# Altium PCB PCB1.PcbDoc
Units mm, origin at the board's own origin, x right, y up, seen from the top; angles counter-clockwise.
Board outline 111.76 x 101.6 mm, 2 copper layers (Top Layer, Bottom Layer); 74 components, 68 nets, 260 pads, 21 vias.
Unrouted connection lines stored in the file: 1.
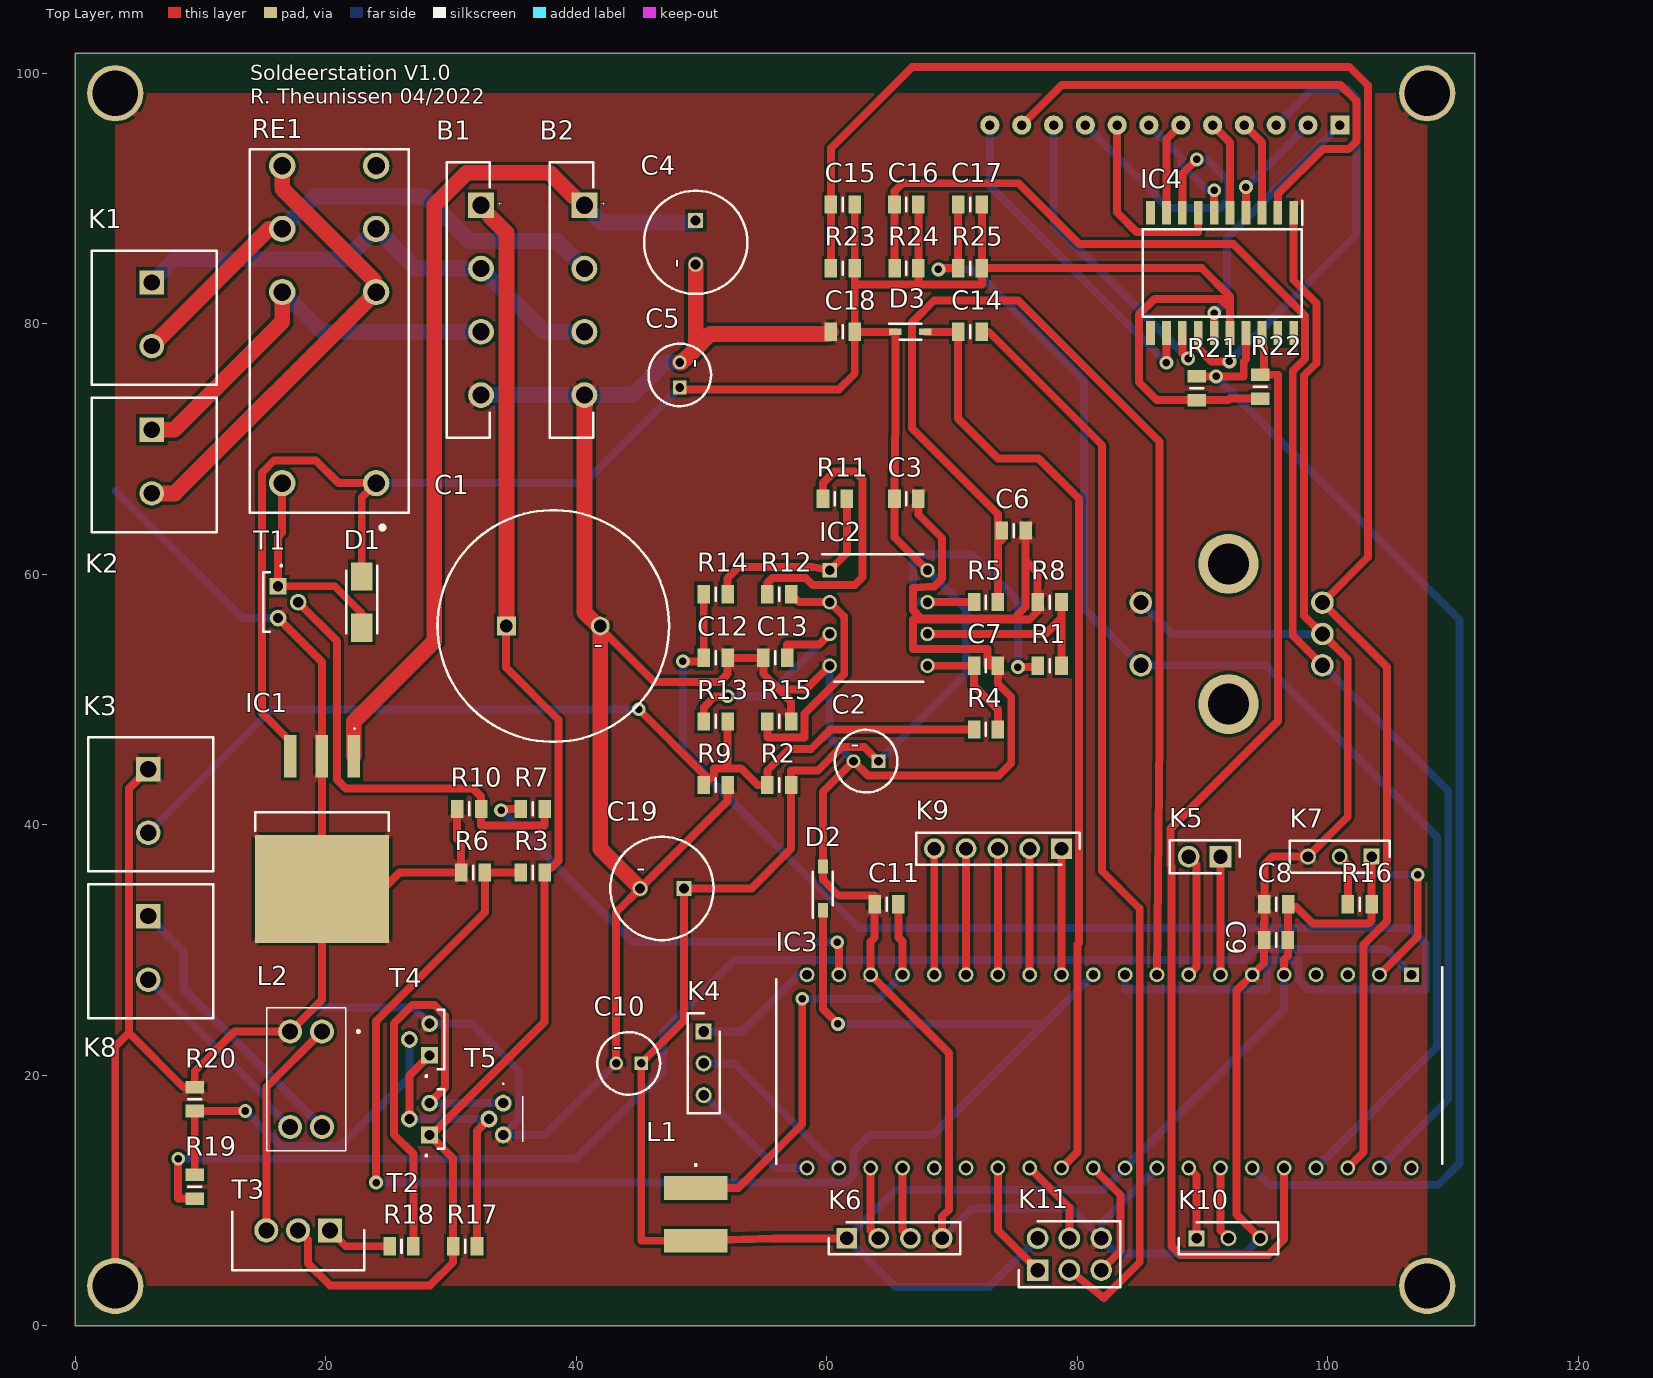
[diagram p0: Top Layer view]
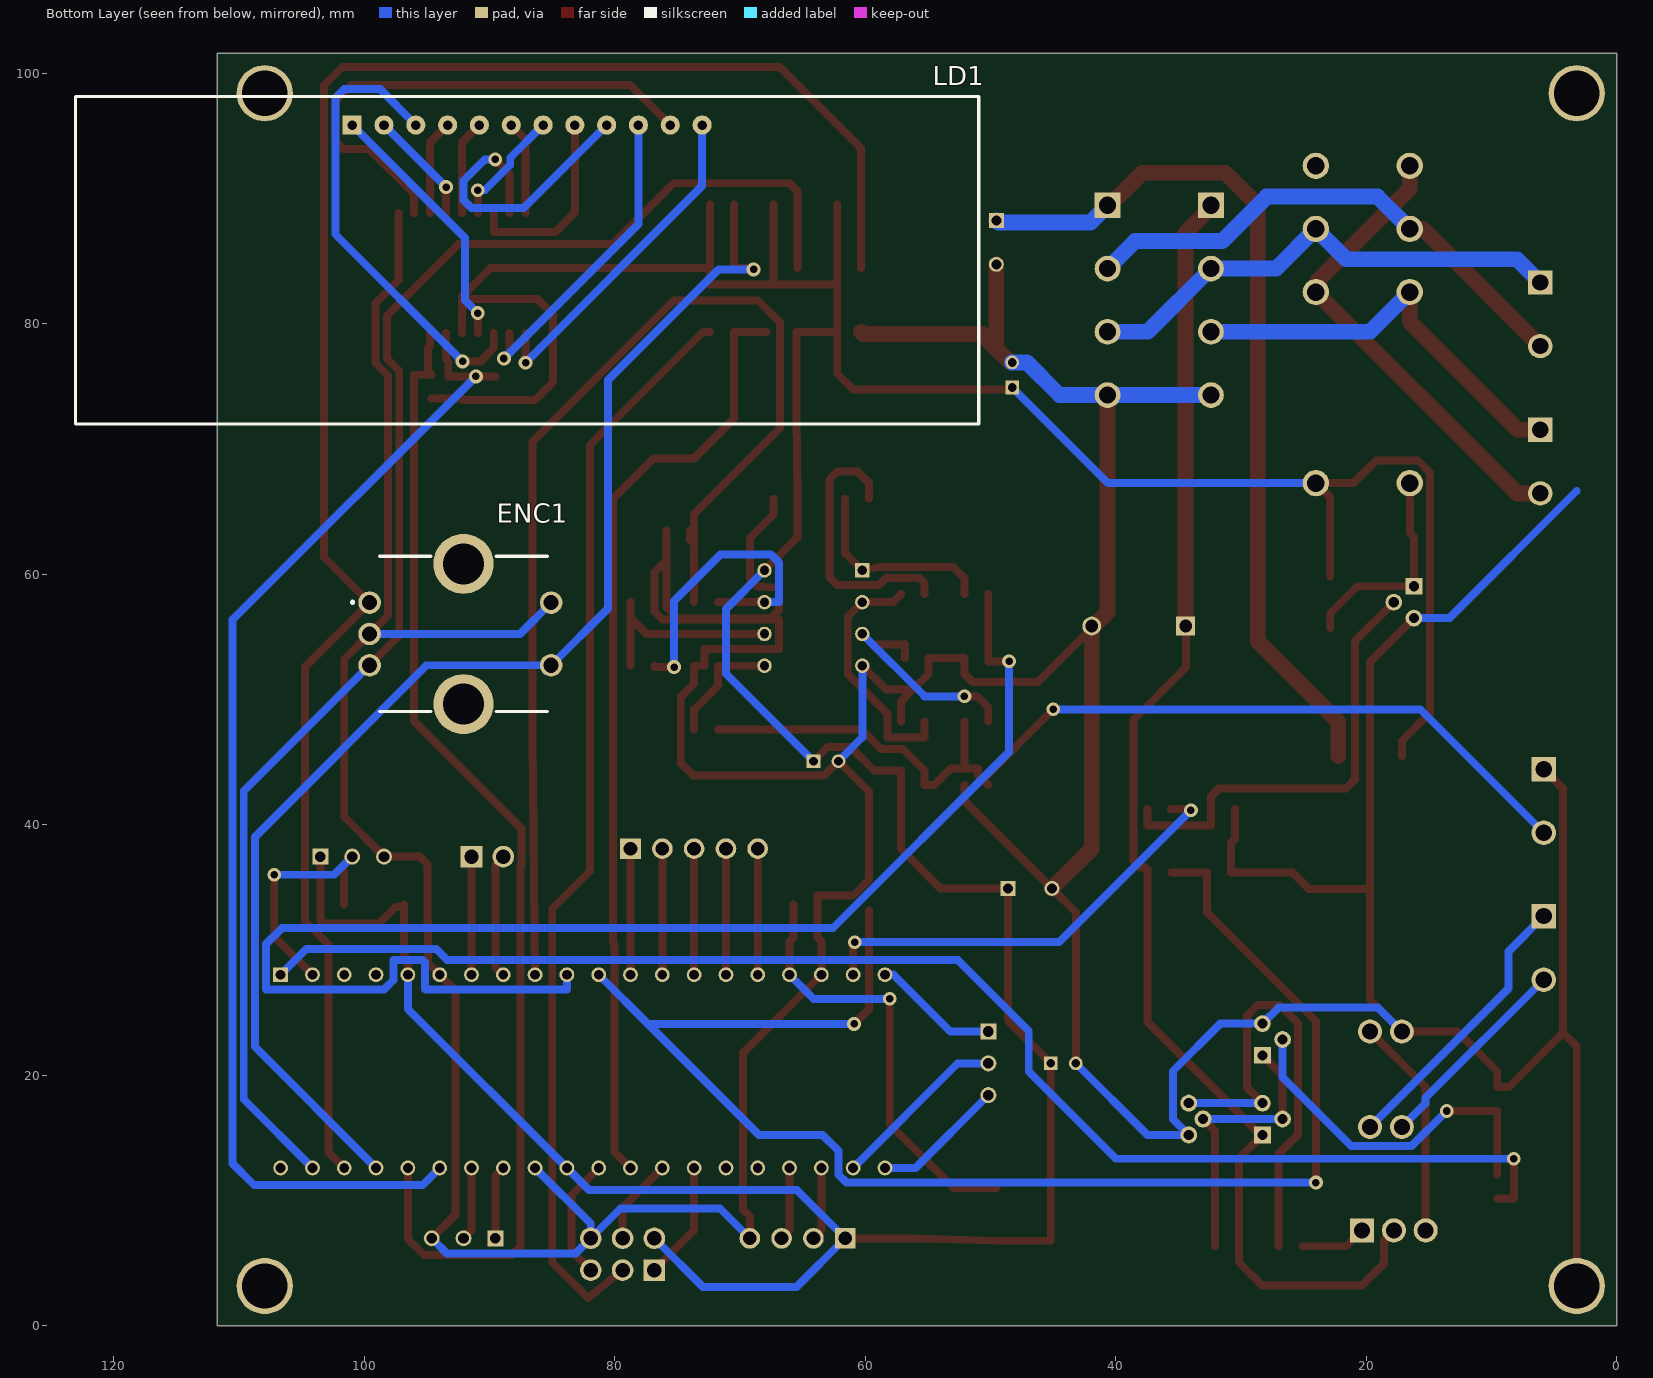
[diagram p1: Bottom Layer view, seen from below]
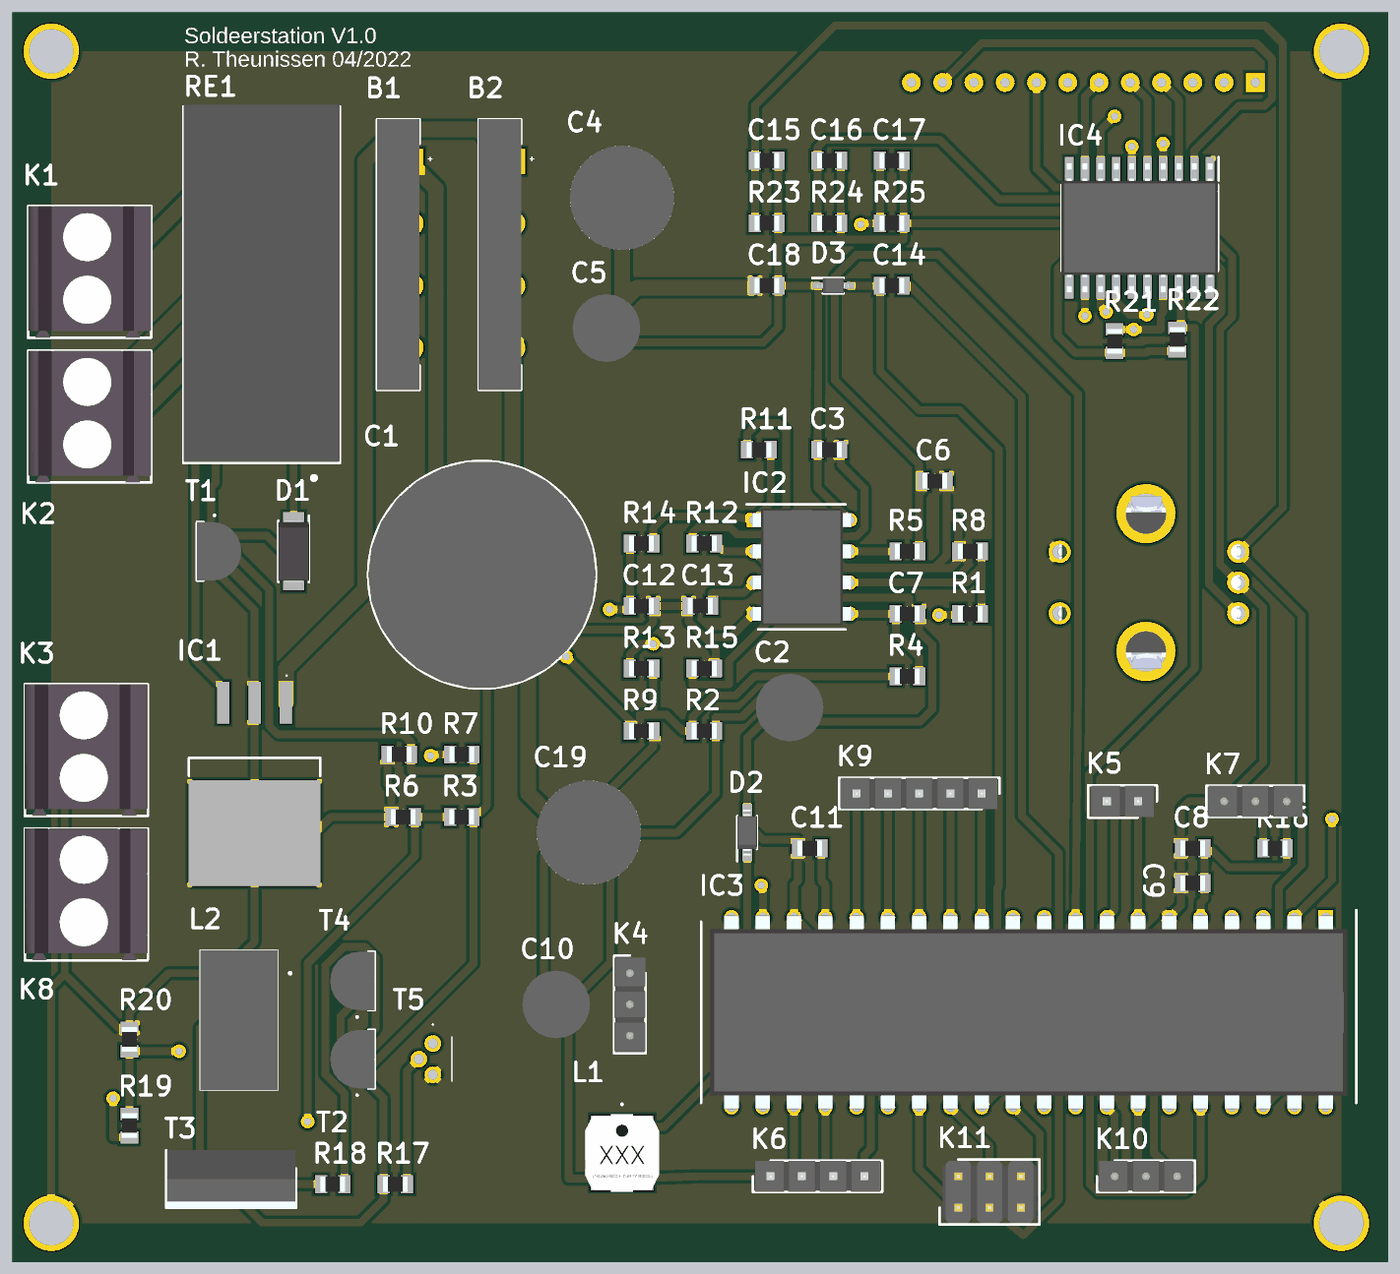
[diagram p2: 3D render of the assembled board from above, using the file's embedded part models]

## Layer stack, top to bottom
Top Solder: solder mask 0.0102, Solder Resist, Dk 3.5
Top Layer: signal copper 0.0356
Dielectric 1: dielectric 0.32, FR-4, Dk 4.8
Bottom Layer: signal copper 0.0356
Bottom Solder: solder mask 0.0102, Solder Resist, Dk 3.5

## Board outline
0,0 111.76,0 111.76,101.6 0,101.6

## Design rules (kind name [scope] priority, off if disabled: settings)
Clearance [All] p1: gap=0.254 ignorepadtopadclearanceinfootprint=FALSE except(0: Arc-Hole Track-Hole SMDPad-Hole THPad-Hole Via-Hole Fill-Hole Poly-Hole Region-Hole Text-Hole)
Height [All] p1 off: minheight=0 maxheight=25.4 prefheight=12.7
PolygonConnect [All] p1: connectstyle=Relief reliefconductorwidth=0.5 reliefentries=4 polygonreliefangle="45 Angle" airgapwidth=0.254
RoutingVias [All] p1: holewidth=0.6 width=1.1 viastyle="Through Hole" minholewidth=0.6 minwidth=1.1 maxholewidth=0.6 maxwidth=1.1
SolderMaskExpansion [All] p1: expansion=0.102 istentingtop=FALSE
Width [All] p1: maxlimit=1.27 minlimit=0.635 preferedwidth=0.635
29 further rules are at their usual default settings.

## Classes and differential pairs
component class Voeding: B1 B2 C1 C4 C5 D1 D2 IC1 K1 K2 R3 R6 R7 R10 RE1 T1
component class Temp_Sensing: C2 C3 C6 C7 C12 C13 IC2 K3 R1 R2 R4 R5 R8 R9 R11 R12 R13 R14 R15
component class Logic: C8 C9 C10 C11 C14 D3 IC3 K4 K5 K6 K7 K9 K10 K11 L1 R16 R21 R22
component class Heater_Driver: K8 L2 R17 R18 R19 R20 T2 T3 T4 T5
component class Display: C15 C16 C17 C18 C19 ENC1 IC4 LD1 R23 R24 R25

## Components (designator, comment, footprint, x,y, rotation, side; value= is the part's Value field where it differs from the comment)
B1 "GBU606-G" GBU606G 32.385,89.475 r90 top
B2 "GBU606-G" GBU606G 40.64,89.475 r90 top
C1 "4700µ" CAPPRD750W80D1850H4150 34.41,55.88 r0 top
C2 "10 uF" CAPPRD200W52D500H1250 64.135,45.085 r180 top
C3 "100n" CAPC1005X56N 66.355,66.04 r180 top
C4 "100µ" CAPPRD350W60D825H1300 49.53,88.265 r270 top
C5 "10µ" CAPPRD200W52D500H1250 48.26,74.93 r90 top
C6 "10n" CAPC1005X56N 74.93,63.5 r180 top
C7 "10n" CAPC1005X56N 72.705,52.705 r180 top
C8 "100n" CAPC1005X56N 95.885,33.655 r0 top
C9 "100n" CAPC1005X56N 95.875,30.81 r0 top
C10 "10µ" CAPPRD200W52D500H1250 45.18,20.955 r180 top
C11 "100n" CAPC1005X56N 64.77,33.655 r0 top
C12 "10n" CAPC1005X56N 51.12,53.34 r180 top
C13 "10n" CAPC1005X56N 55.88,53.34 r0 top
C14 "100n" CAPC1005X56N 71.435,79.375 r180 top
C15 "10n" CAPC1005X56N 61.28,89.535 r0 top
C16 "10n" CAPC1005X56N 66.355,89.535 r0 top
C17 "10n" CAPC1005X56N 71.435,89.535 r0 top
C18 "100n" CAPC1005X56N 61.28,79.375 r0 top
C19 "100µ" CAPPRD350W60D825H1300 48.585,34.925 r180 top
D1 "FM4007W-W" DIOM5025X231N 22.86,57.785 r270 top
D2 "MMSZ4689T1G" SOD3716X135N 59.69,34.925 r90 top
D3 "SMMDL914T11NG" SOD2512X110N 66.675,79.375 r0 top
ENC1 "PEC11R-4225F-S0024" PEC12R-4XXXF-SXXXX_1 92.075,55.245 r270 bottom
IC1 "TL780-05CKTTR" TL78005CKTTR 19.685,38.735 r180 top
IC2 "MCP6002-E_P" DIP781W56P254L950H533Q8N 64.135,56.515 r0 top
IC3 "ATMEGA4809-PF" DIP1543W58P254L5175H635Q40N 82.55,20.32 r270 top
IC4 "TM1637" SOIC127P1045X280-20N 91.567,84.074 r270 top
K1 "1716020000" 1716020000 6.096,83.312 r270 top
K2 "1716020000" 1716020000 6.096,71.552 r270 top
K3 "Printkroonsteen 2 POL" 1716020000 5.817,44.45 r270 top
K4 "M20-9990345" HDRV3W64P0X254_1X3_762X254X864P 50.165,23.495 r270 top
K5 "M20-9990246" HDRV2W66P0X254_1X2_508X254X874P 91.44,37.465 r180 top
K6 "M20-9770446" HDRV4W64P0X254_1X4_1016X254X834P 61.595,6.985 r0 top
K7 "M20-9990345" HDRV3W64P0X254_1X3_762X254X864P 103.505,37.465 r180 top
K8 "Printkroonsteen 2 POL" 1716020000 5.817,32.715 r270 top
K9 "M20-9990545" HDRV5W64P0X254_1X5_1270X254X864P 78.74,38.1 r180 top
K10 "M20-9990345" HDRV3W64P0X254_1X3_762X254X864P 89.535,6.985 r0 top
K11 "M20-9760342" HDRV6W66P254_2X3_762X508X830P 76.835,4.445 r0 top
L1 "10µH" VLS6045 49.53,8.89 r270 top
L2 "CM2545X171B-10" CM2545X171B10 19.685,23.495 r180 top
LD1 "KW4-801AVB" KW4-801AVB-FP 86.995,95.885 r180 bottom locked
R1 "18k" RESC2012X65N 77.79,52.705 r0 top
R2 "1M" RESC2012X65N 56.2,43.18 r0 top
R3 "68k" RESC2012X65N 36.51,36.195 r0 top
R4 "5k6" RESC2012X65N 72.705,47.625 r180 top
R5 "5k6" RESC2012X65N 72.705,57.785 r180 top
R6 "10k" RESC2012X65N 31.75,36.195 r0 top
R7 "10k" RESC2012X65N 36.515,41.275 r0 top
R8 "100E" RESC2012X65N 77.79,57.785 r0 top
R9 "10M" RESC2012X65N 51.12,43.18 r180 top
R10 "4k7" RESC2012X65N 31.435,41.275 r0 top
R11 "18k" RESC2012X65N 60.645,66.04 r180 top
R12 "18k" RESC2012X65N 56.2,58.42 r0 top
R13 "5k6" RESC2012X65N 51.12,48.26 r0 top
R14 "5k6" RESC2012X65N 51.12,58.42 r0 top
R15 "100E" RESC2012X65N 56.2,48.26 r180 top
R16 "4k7" RESC2012X65N 102.555,33.655 r0 top
R17 "4k7" RESC2012X65N 31.115,6.35 r180 top
R18 "100E" RESC2012X65N 26.035,6.35 r180 top
R19 "10k" RESC2012X65N 9.525,11.11 r90 top
R20 "4k7" RESC2012X65N 9.525,18.1 r270 top
R21 "4k7" RESC2012X65N 89.535,74.864 r270 top
R22 "4k7" RESC2012X65N 94.615,74.996 r270 top
R23 "10k" RESC2012X65N 61.28,84.455 r0 top
R24 "10k" RESC2012X65N 66.36,84.455 r0 top
R25 "10k" RESC2012X65N 71.44,84.455 r0 top
RE1 "RT424005" RT42 20.26,67.29 r90 top
T1 "BC547CBU" BC547CBU 16.43,59.055 r270 top
T2 "BC547CBU" BC547CBU 28.02,15.24 r90 top
T3 "IRF9Z34NPBF" TO254P469X1042X1967-3P 20.32,7.62 r180 top
T4 "BC547CBU" BC547CBU 28.02,21.59 r90 top
T5 "BC557C" BC557C 34.163,17.78 r270 top

## Footprints (in the part's own frame and the unit in brackets; to place one, negate y for a bottom-side part, rotate by r counter-clockwise, add the part's x,y. Pads: shape width x height; smd on the part's side, far side on the other; paste and mask are expansions set on the pad)
1716020000 [mm]
  rect 1.95x1.95 hole 1.3: 1(0,0)
  round 1.95 hole 1.3: 2(5.08,0)
  silkscreen extent -2.54,-4.8 8.17,5.2, body extent -2.54,-4.8 8.17,5.2, height 13.8
BC547CBU [mm]
  rect 1.333x1.333 hole 0.82: 1(0,-0.254)
  round 1.333 hole 0.82: 2(1.27,1.35) 3(2.54,-0.254)
  silkscreen extent -1.7,-1.43 3.65,0.05, body extent -1.11,-1.43 3.65,2.19, height 5.43
BC557C [mm]
  round 1.35 hole 0.81: 1(0,0) 2(1.27,-1.143) 3(2.54,0)
  silkscreen extent -1.6,-0.05 3.07,1.55
CAPC1005X56N [mm]
  rect 1x1.45 smd: 1(-0.95,0) 2(0.95,0)
  silkscreen extent 0,-0.53 0,0.53, body extent -1,-0.63 1,0.63, height 0.65
CAPPRD200W52D500H1250 [mm]
  rect 1.1x1.1 hole 0.7: 1(0,0)
  round 1.1 hole 0.7: 2(2,0)
  silkscreen extent -1.5,-2.5 3.5,2.5, body extent -1.75,-2.75 3.75,2.75, height 12.5
CAPPRD350W60D825H1300 [mm]
  rect 1.2x1.2 hole 0.8: 1(0,0)
  round 1.2 hole 0.8: 2(3.5,0)
  silkscreen extent -2.37,-4.13 5.87,4.13, body extent -2.5,-4.25 6,4.25, height 13
CAPPRD750W80D1850H4150 [mm]
  rect 1.5x1.5 hole 1: 1(0,0)
  round 1.5 hole 1: 2(7.5,0)
  silkscreen extent -5.5,-9.25 13,9.25, body extent -5.5,-9.25 13,9.25, height 41.5
CM2545X171B10 [mm]
  round 1.905 hole 1.27: 1(0,0) 2(2.54,0) 3(2.54,7.62) 4(0,7.62)
  silkscreen extent -3,-1.88 4.42,9.5, body extent -1.88,-1.88 4.42,9.5, height 9.6
DIOM5025X231N [mm]
  rect 2.25x1.7 smd: 1(-2.05,0) 2(2.05,0)
  silkscreen extent -2.9,-1.24 2.5,1.24, body extent -2.5,-1.24 2.5,1.24, height 2.31
DIP781W56P254L950H533Q8N [mm]
  rect 1.158x1.158 hole 0.758: 1(-3.905,3.81)
  round 1.158 hole 0.758: 2(-3.905,1.27) 3(-3.905,-1.27) 4(-3.905,-3.81) 5(3.905,-3.81) 6(3.905,-1.27) 7(3.905,1.27) 8(3.905,3.81)
  silkscreen extent -4.48,-5.08 3.56,5.08, body extent -4.04,-4.75 4.04,4.75, height 5.33
DIP1543W58P254L5175H635Q40N [mm]
  rect 1.184x1.184 hole 0.784: 1(-7.715,24.13)
  round 1.184 hole 0.784: 2(-7.715,21.59) 3(-7.715,19.05) 4(-7.715,16.51) 5(-7.715,13.97) 6(-7.715,11.43) 7(-7.715,8.89) 8(-7.715,6.35) 9(-7.715,3.81) 10(-7.715,1.27) 11(-7.715,-1.27) 12(-7.715,-3.81) 13(-7.715,-6.35) 14(-7.715,-8.89) 15(-7.715,-11.43) 16(-7.715,-13.97) 17(-7.715,-16.51) 18(-7.715,-19.05) 19(-7.715,-21.59) 20(-7.715,-24.13) 21(7.715,-24.13) 22(7.715,-21.59) 23(7.715,-19.05) 24(7.715,-16.51) 25(7.715,-13.97) 26(7.715,-11.43) 27(7.715,-8.89) 28(7.715,-6.35) 29(7.715,-3.81) 30(7.715,-1.27) 31(7.715,1.27) 32(7.715,3.81) 33(7.715,6.35) 34(7.715,8.89) 35(7.715,11.43) 36(7.715,13.97) 37(7.715,16.51) 38(7.715,19.05) 39(7.715,21.59) 40(7.715,24.13)
  silkscreen extent -8.31,-26.61 7.37,26.61, body extent -7.86,-25.88 7.86,25.88, height 6.35
GBU606G [mm]
  rect 2.055x2.055 hole 1.37: 1(0,0)
  round 2.055 hole 1.37: 2(-5.05,0) 3(-10.1,0) 4(-15.15,0)
  silkscreen extent -18.58,-0.69 3.42,2.75, body extent -18.57,-0.69 3.43,2.76, height 21.05
HDRV2W66P0X254_1X2_508X254X874P [mm]
  rect 1.725x1.725 hole 1.15: 1(0,0)
  round 1.725 hole 1.15: 2(2.54,0)
  silkscreen extent -1.52,-1.32 4.06,1.32, body extent -1.27,-1.27 3.81,1.27, height 8.74
HDRV3W64P0X254_1X3_762X254X864P [mm]
  rect 1.275x1.275 hole 0.85: 1(0,0)
  round 1.275 hole 0.85: 2(2.54,0) 3(5.08,0)
  silkscreen extent -1.45,-1.27 6.53,1.27, body extent -1.27,-1.27 6.35,1.27, height 8.64
HDRV4W64P0X254_1X4_1016X254X834P [mm]
  rect 1.65x1.65 hole 1.1: 1(0,0)
  round 1.65 hole 1.1: 2(2.54,0) 3(5.08,0) 4(7.62,0)
  silkscreen extent -1.45,-1.27 9.07,1.27, body extent -1.27,-1.27 8.89,1.27, height 8.34
HDRV5W64P0X254_1X5_1270X254X864P [mm]
  rect 1.65x1.65 hole 1.1: 1(0,0)
  round 1.65 hole 1.1: 2(2.54,0) 3(5.08,0) 4(7.62,0) 5(10.16,0)
  silkscreen extent -1.45,-1.27 11.61,1.27, body extent -1.27,-1.27 11.43,1.27, height 8.64
HDRV6W66P254_2X3_762X508X830P [mm]
  rect 1.725x1.725 hole 1.15: 1(0,0)
  round 1.725 hole 1.15: 2(0,2.54) 3(2.54,0) 4(2.54,2.54) 5(5.08,0) 6(5.08,2.54)
  silkscreen extent -1.52,-1.37 6.6,3.91, body extent -1.27,-1.27 6.35,3.81, height 8.38
KW4-801AVB-FP [mil]
  rect 60x60 hole 30: 1(-550,0)
  round 60 hole 30: 2(-450,0) 3(-350,0) 4(-250,0) 5(-150,0) 6(-50,0) 7(50,0) 8(150,0) 9(250,0) 10(350,0) 11(450,0) 12(550,0)
  silkscreen extent -1420,-940 1420,90, body extent -1415,-935 1415,85, height 335
PEC12R-4XXXF-SXXXX_1 [mm]
  round 1.8 hole 1.2: 1(-2.5,-7.5) 2(2.5,-7.5) 3(0,-7.5) 4(-2.5,7) 5(2.5,7)
  round 4.8 hole 3.28: 6(5.6,0) 7(-5.6,0)
  silkscreen extent -6.2,-8.95 6.2,6.7, body extent -7,-7.75 6.99,7.15, height 31.51
RESC2012X65N [mm]
  rect 1x1.45 smd: 1(-0.95,0) 2(0.95,0)
  silkscreen extent 0,-0.53 0,0.53, body extent -1,-0.63 1,0.63, height 0.65
RT42 [mm]
  round 2.1 hole 1.4: 1(0,-3.75) 2(15.26,-3.75) 3(20.3,-3.75) 4(25.34,-3.75) 5(25.34,3.75) 6(20.3,3.75) 7(15.26,3.75) 8(0,3.75)
  silkscreen extent -3.67,-6.35 26.65,6.35, body extent -2.21,-6.35 26.79,6.35, height 15.86
SOD2512X110N [mm]
  rect 1x0.5 smd: 1(-1.2,0) 2(1.2,0)
  silkscreen extent -1.7,-0.62 0.85,0.62, body extent -1.25,-0.63 1.25,0.63, height 1.1
SOD3716X135N [mm]
  rect 1.15x0.8 smd: 1(-1.75,0) 2(1.75,0)
  silkscreen extent -2.33,-0.8 1.34,0.8, body extent -1.86,-0.8 1.86,0.8, height 1.35
SOIC127P1045X280-20N [mm]
  rect 1.9x0.7 smd: 1(-4.8,5.715) 2(-4.8,4.445) 3(-4.8,3.175) 4(-4.8,1.905) 5(-4.8,0.635) 6(-4.8,-0.635) 7(-4.8,-1.905) 8(-4.8,-3.175) 9(-4.8,-4.445) 10(-4.8,-5.715) 11(4.8,-5.715) 12(4.8,-4.445) 13(4.8,-3.175) 14(4.8,-1.905) 15(4.8,-0.635) 16(4.8,0.635) 17(4.8,1.905) 18(4.8,3.175) 19(4.8,4.445) 20(4.8,5.715)
  silkscreen extent -5.75,-6.35 3.5,6.42, body extent -5.23,-6.35 5.23,6.35, height 2.8
TL78005CKTTR [mm]
  rect 1x3.4 smd: 1(-2.54,-6.745) 2(0,-6.745) 3(2.54,-6.745)
  rect 10.7x8.6 smd: 4(0,3.855)
  silkscreen extent -5.33,-9 5.33,-0.8
TO254P469X1042X1967-3P [mm]
  rect 1.92x1.92 hole 1.28: 1(0,0)
  round 1.92 hole 1.28: 2(2.54,0) 3(5.08,0)
  silkscreen extent -2.73,-1.49 7.81,3.2, body extent -2.67,-1.5 7.75,3.19, height 18.84
VLS6045 [mm]
  rect 1.9x5.1 smd: 1(-2.1,0) 2(2.1,0)
  silkscreen extent -4,-0.05 -3.9,0.05, body extent -3.15,-3 3.15,3, height 4.5

## Part data
B1 B2: "Bridge Rectifier", Manufacturer_Name="Comchip Technology", Mouser Part Number=750-GBU606-G, Arrow Part Number=GBU606-G, Arrow Price/Stock=https://www.arrow.com/en/products/gbu606-g/comchip-technology?region=nac, Datasheet Link=https://www.comchiptech.com/product.php?id=2217, Height=20.95mm, Manufacturer_Part_Number=GBU606-G, Mouser Price/Stock=https://www.mouser.co.uk/ProductDetail/Comchip-Technology/GBU606-G?qs=XEIV%2Fho1H6d1WplLbEJ0gw%3D%3D
C1: library part 50PK4700MEFC18X40, "ELCO 4700 uF", Manufacturer_Name=Rubycon, Mouser Part Number=232-50PK4700MEFC18X4, Arrow Part Number=50PK4700MEFC18X40, Arrow Price/Stock=https://www.arrow.com/en/products/50pk4700mefc18x40/rubycon, Datasheet Link=http://www.rubycon.co.jp/en/catalog/e_pdfs/aluminum/e_pk.pdf, Height=41.5mm, Manufacturer_Part_Number=50PK4700MEFC18X40, Mouser Price/Stock=https://www.mouser.co.uk/ProductDetail/Rubycon/50PK4700MEFC18X40?qs=T3oQrply3y8fu7oTpkJ7DA%3D%3D
C2 C5 C10: library part 860020672010, "ELCO 10 uF", Manufacturer_Name="Wurth Elektronik", Mouser Part Number=710-860020672010, Datasheet Link=https://katalog.we-online.de/pbs/datasheet/860020672010.pdf, Height=12.5mm, Manufacturer_Part_Number=860020672010, Mouser Price/Stock=https://www.mouser.co.uk/ProductDetail/Wurth-Elektronik/860020672010?qs=0KOYDY2FL2%252BaHkqkc1q4lw%3D%3D
C3 C6 C7 C8 C9 C11 C12 C13 C14 C15 C16 C17 C18: library part 0402YC104MAT2A, "Capacitor SMD 0805", Manufacturer_Name=AVX, Mouser Part Number=581-0402YC104MAT2A, Datasheet Link=http://www.mouser.com/catalog/supplier/library/pdf/AVXSurfaceMountCeramic.pdf, Height=0.56mm, Manufacturer_Part_Number=0402YC104MAT2A, Mouser Price/Stock=https://www.mouser.co.uk/ProductDetail/AVX/0402YC104MAT2A?qs=O2%2FeDh0sX9yiCaLwpXy1bw%3D%3D
C4 C19: library part RGA101M1HBK-0811G, "ELCO 100 uF", Manufacturer_Name=Lelon, Mouser Part Number=140-RGA101M1HBK0811G, Arrow Part Number=RGA101M1HBK-0811G, Arrow Price/Stock=https://www.arrow.com/en/products/rga101m1hbk-0811g/lelon-electronics, Datasheet Link=https://www.arrow.com/en/products/rga101m1hbk-0811g/lelon-electronics, Height=13mm, Manufacturer_Part_Number=RGA101M1HBK-0811G, Mouser Price/Stock=https://www.mouser.co.uk/ProductDetail/Lelon/RGA101M1HBK-0811G?qs=pNDdEcSXiOBNivHdElCSJA%3D%3D
D1: "Diode 1000V 1A", Manufacturer_Name=Rectron, Mouser Part Number=583-FM4007W-W, Arrow Part Number=FM4007W-W, Arrow Price/Stock=https://www.arrow.com/en/products/fm4007w-w/rectron?region=nac, Datasheet Link=http://www.rectron.com/data_sheets/fm4001w-fm4007w.pdf, Height=2.31mm, Manufacturer_Part_Number=FM4007W-W, Mouser Price/Stock=https://www.mouser.co.uk/ProductDetail/Rectron/FM4007W-W?qs=jY2200qj%252BWCBLCSrfIQtJA%3D%3D
D2: "Zener Diode", Manufacturer_Name="ON Semiconductor", Mouser Part Number=863-MMSZ4689T1G, Arrow Part Number=MMSZ4689T1G, Arrow Price/Stock=https://www.arrow.com/en/products/mmsz4689t1g/on-semiconductor, Datasheet Link=http://www.onsemi.com/pub/Collateral/MMSZ4678T1-D.PDF, Height=1.35mm, Manufacturer_Part_Number=MMSZ4689T1G, Mouser Price/Stock=https://www.mouser.co.uk/ProductDetail/ON-Semiconductor/MMSZ4689T1G/?qs=P4IOph%252Bbot%252Blaz%2FZtdyBaA%3D%3D
D3: library part SMMDL914T1G, "Diode 100V 200mA 4ns", Manufacturer_Name="ON Semiconductor", Mouser Part Number=863-SMMDL914T1G, Arrow Part Number=SMMDL914T1G, Arrow Price/Stock=https://www.arrow.com/en/products/smmdl914t1g/on-semiconductor, Datasheet Link=https://www.onsemi.com/pub/Collateral/MMDL914T1-D.PDF, Height=1.1mm, Manufacturer_Part_Number=SMMDL914T1G, Mouser Price/Stock=https://www.mouser.co.uk/ProductDetail/onsemi/SMMDL914T1G?qs=3PKVEWFFm2%252B2VboGvGtVUg%3D%3D
ENC1: "Rotary Button", Manufacturer_Name=Bourns, Mouser Part Number=652-PEC11R-4225F-S24, Arrow Part Number=PEC11R-4225F-S0024, Arrow Price/Stock=https://www.arrow.com/en/products/pec11r-4225f-s0024/bourns?region=nac, Datasheet Link=https://componentsearchengine.com/Datasheets/1/PEC11R-4225F-S0024.pdf, Manufacturer_Part_Number=PEC11R-4225F-S0024, Mouser Price/Stock=https://www.mouser.co.uk/ProductDetail/Bourns/PEC11R-4225F-S0024?qs=Zq5ylnUbLm4N6UNkPX3pkQ%3D%3D
IC1: "Voltage Regulator 5V", Manufacturer_Name="Texas Instruments", Mouser Part Number=595-TL780-05CKTTR, Arrow Part Number=TL780-05CKTTR, Arrow Price/Stock=https://www.arrow.com/en/products/tl780-05ckttr/texas-instruments?region=nac, Datasheet Link=http://www.ti.com/general/docs/suppproductinfo.tsp?distId=26&gotoUrl=http%3A%2F%2Fwww.ti.com%2Flit%2Fgpn%2Ftl780, Height=5.08mm, Manufacturer_Part_Number=TL780-05CKTTR, Mouser Price/Stock=https://www.mouser.co.uk/ProductDetail/Texas-Instruments/TL780-05CKTTR?qs=7kv20MEVUlhtPP21hgiOlA%3D%3D
IC2: "Dual OPAMP", Arrow Part Number=MCP6002-E/P, Manufacturer_Name=Microchip, Mouser Part Number=579-MCP6002-E/P, Arrow Price/Stock=https://www.arrow.com/en/products/mcp6002-ep/microchip-technology?region=nac, Datasheet Link=http://componentsearchengine.com/Datasheets/3/MCP6002-E_P.pdf, Height=5.334mm, Manufacturer_Part_Number=MCP6002-E/P, Mouser Price/Stock=https://www.mouser.co.uk/ProductDetail/Microchip-Technology/MCP6002-E-P?qs=hul3WK2zl4pqRWzdnAsu%2FQ%3D%3D
IC3: "8-bit MCU", Manufacturer_Name=Microchip, Mouser Part Number=556-ATMEGA4809-PF, Datasheet Link=http://ww1.microchip.com/downloads/en/DeviceDoc/40-pin-Data-Sheet-megaAVR-0-series-DS40002104A.pdf, Height=6.35mm, Manufacturer_Part_Number=ATMEGA4809-PF, Mouser Price/Stock=https://www.mouser.co.uk/ProductDetail/Microchip-Technology-Atmel/ATMEGA4809-PF?qs=T3oQrply3y9UlpZbCygk%252BQ%3D%3D
IC4: "Driver LED Display", Manufacturer_Name="TITAN MICRO ELECTRONICS", Manufacturer_Part_Number="TM1637 (SOP)", Datasheet Link=https://www.mcielectronics.cl/website_MCI/static/documents/Datasheet_TM1637.pdf, Height=2.8mm
K1 K2: "Printkroonsteen 2 POL", Manufacturer_Name=Weidmuller, Mouser Part Number=470-1716020000, Datasheet Link=https://catalog.weidmueller.com/catalog/Start.do?ObjectID=1716020000&_ga=2.21797499.1716783809.1613378202-511725545.1613378202, Manufacturer_Part_Number=1716020000, Mouser Price/Stock=https://www.mouser.co.uk/ProductDetail/Weidmuller/1716020000?qs=WJDKaGZ8K%252B7GSEFQgvMjVA%3D%3D
K3 K8: library part 1716020000, Manufacturer_Name=Weidmuller, Mouser Part Number=470-1716020000, Datasheet Link=https://catalog.weidmueller.com/catalog/Start.do?ObjectID=1716020000&_ga=2.21797499.1716783809.1613378202-511725545.1613378202, Manufacturer_Part_Number=1716020000, Mouser Price/Stock=https://www.mouser.co.uk/ProductDetail/Weidmuller/1716020000?qs=WJDKaGZ8K%252B7GSEFQgvMjVA%3D%3D
K4 K7 K10: "1R 3P Connector", Manufacturer_Name=Harwin, Mouser Part Number=855-M20-9990345, Datasheet Link=https://cdn.harwin.com/pdfs/M20-999.pdf, Height=8.64mm, Manufacturer_Part_Number=M20-9990345, Mouser Price/Stock=https://www.mouser.co.uk/ProductDetail/Harwin/M20-9990345?qs=ulE8k0yEMYbl6ZPCtNdmpA%3D%3D
K5: "1R 2P Connector", Manufacturer_Name=Harwin, Mouser Part Number=855-M20-9990246, Datasheet Link=https://cdn.harwin.com/pdfs/M20-999.pdf, Height=8.74mm, Manufacturer_Part_Number=M20-9990246, Mouser Price/Stock=https://www.mouser.co.uk/ProductDetail/Harwin/M20-9990246?qs=Jph8NoUxIfWjw4WmyRvzag%3D%3D
K6: "1R 4P Connector", Manufacturer_Name=Harwin, Mouser Part Number=855-M20-9770446, Datasheet Link=https://componentsearchengine.com/Datasheets/1/M20-9770446.pdf, Height=8.34mm, Manufacturer_Part_Number=M20-9770446, Mouser Price/Stock=https://www.mouser.co.uk/ProductDetail/Harwin/M20-9770446?qs=ulE8k0yEMYbCPpMPHeYh4w%3D%3D
K9: "1R 5P Connector", Manufacturer_Name=Harwin, Mouser Part Number=855-M20-9990545, Datasheet Link=https://componentsearchengine.com/Datasheets/2/M20-9990545.pdf, Height=8.64mm, Manufacturer_Part_Number=M20-9990545, Mouser Price/Stock=https://www.mouser.co.uk/ProductDetail/Harwin/M20-9990545?qs=ulE8k0yEMYY1AaFSSzjXzw%3D%3D
K11: "2R 6P Connector", Manufacturer_Name=Harwin, Mouser Part Number=855-M20-9760342, Datasheet Link=https://cdn.harwin.com/pdfs/M20-976.pdf, Height=8.3mm, Manufacturer_Part_Number=M20-9760342, Mouser Price/Stock=https://www.mouser.co.uk/ProductDetail/Harwin/M20-9760342/?qs=%252Bk6%2F5FB6qrkaVmYIHZO6zg%3D%3D
L1: library part VLS6045EX-100M-H, "Smoorspoel 10uH", Manufacturer_Name=TDK, Mouser Part Number=810-VLS6045EX-100M-H, Arrow Part Number=VLS6045EX-100M-H, Arrow Price/Stock=https://www.arrow.com/en/products/vls6045ex-100m-h/tdk?region=nac, Datasheet Link=https://product.tdk.com/system/files/dam/doc/product/inductor/inductor/smd/catalog/inductor_automotive_power_vls6045ex-h_en.pdf, Manufacturer_Part_Number=VLS6045EX-100M-H, Mouser Price/Stock=https://www.mouser.co.uk/ProductDetail/TDK/VLS6045EX-100M-H?qs=qSfuJ%252Bfl%2Fd6r84tw2EUg2Q%3D%3D
L2: "Common mode smoorspoel 10A", Manufacturer_Name="Laird Technologies", Mouser Part Number=N/A, Arrow Part Number=CM2545X171B-10, Arrow Price/Stock=https://www.arrow.com/en/products/cm2545x171b-10/laird-technologies, Datasheet Link=https://datasheet.datasheetarchive.com/originals/dk/DKDS-7/122753.pdf, Height=9.5mm, Manufacturer_Part_Number=CM2545X171B-10, Mouser Price/Stock=https://www.mouser.co.uk/ProductDetail/Laird/CM2545X171B-10?qs=PzGy0jfpSMtNfkEypgU65A%3D%3D
LD1: "4-Digit LED Display"
R1 R2 R3 R4 R5 R6 R7 R8 R9 R10 R11 R12 R13 R14 R15 R16 R17 R18 R19 R20 R21 R22 R23 R24 R25: library part CPF0805B100RE1, "Resistor SMD 0805", Manufacturer_Name="TE Connectivity", Mouser Part Number=279-CPF0805B100RE1, Arrow Part Number=CPF0805B100RE1, Arrow Price/Stock=https://www.arrow.com/en/products/cpf0805b100re1/te-connectivity?region=nac, Datasheet Link=https://datasheet.datasheetarchive.com/originals/distributors/DKDS-21/401696.pdf, Height=0.65mm, Manufacturer_Part_Number=CPF0805B100RE1, Mouser Price/Stock=https://www.mouser.co.uk/ProductDetail/TE-Connectivity-Holsworthy/CPF0805B100RE1?qs=9ylKvqdyudkCWLPT1QvLZQ%3D%3D
RE1: "Contactor", Manufacturer_Name="TE Connectivity", Mouser Part Number=655-RT424005, Arrow Part Number=RT424005, Arrow Price/Stock=https://www.arrow.com/en/products/rt424005/te-connectivity?region=nac, Datasheet Link=https://www.te.com/commerce/DocumentDelivery/DDEController?Action=showdoc&DocId=Data+Sheet%7FRT2%7F1014%7Fpdf%7FEnglish%7FENG_DS_RT2_1014.pdf%7F5-1393243-9, Manufacturer_Part_Number=RT424005, Mouser Price/Stock=https://www.mouser.co.uk/ProductDetail/TE-Connectivity-Schrack/RT424005?qs=KKrrU%252BaSadKRsQcVuAjnsQ%3D%3D
T1 T2 T4: "Transistor BJT NPN", Manufacturer_Name="ON Semiconductor", Mouser Part Number=512-BC547CBU, Arrow Part Number=BC547CBU, Arrow Price/Stock=https://www.arrow.com/en/products/bc547cbu/on-semiconductor?region=nac, Datasheet Link=https://www.onsemi.com/pdf/datasheet/bc550-d.pdf, Height=5.33mm, Manufacturer_Part_Number=BC547CBU, Mouser Price/Stock=https://www.mouser.co.uk/ProductDetail/ON-Semiconductor-Fairchild/BC547CBU/?qs=SpPkH8nd0tbX52Pj0mX5Aw%3D%3D
T3: "MOSFET (P-Channel)", Manufacturer_Name=Infineon, Mouser Part Number=942-IRF9Z34NPBF, Arrow Part Number=IRF9Z34NPBF, Arrow Price/Stock=https://www.arrow.com/en/products/irf9z34npbf/infineon-technologies-ag?region=nac, Datasheet Link=https://www.infineon.com/dgdl/irf9z34npbf.pdf?fileId=5546d462533600a40153561220af1ddd, Height=4.69mm, Manufacturer_Part_Number=IRF9Z34NPBF, Mouser Price/Stock=https://www.mouser.co.uk/ProductDetail/Infineon-IR/IRF9Z34NPBF?qs=9%252BKlkBgLFf16a%2FvlD%252BMCtQ%3D%3D
T5: "Transistor BJT PNP", Manufacturer_Name=NXP, Mouser Part Number=771-BC557C, Datasheet Link=http://uk.rs-online.com/web/p/products/1124775, Height=5.2mm, Manufacturer_Part_Number=BC557C, Mouser Price/Stock=https://www.mouser.co.uk/ProductDetail/NXP-Semiconductors/BC557C?qs=84A%2FDAdkstLO1yR4NjQrgg%3D%3D

## Free pads (board coordinates)
  round 4.5 hole 3.6: Mount1(3.175,98.425) Mount2(3.175,3.175) Mount3(107.95,3.175) Mount4(107.95,98.425)

## Via types
v1: diameter 1.1, hole 0.6, Top Layer to Bottom Layer, 21 vias

## Nets (pads, with @x,y where several pads share a name; then routed paths per layer and width w, separated by ;. In a path a pad name is that pad's centre, name@x,y a point inside that pad or via, vN(x,y) a via of type N, cw(c..) or ccw(c..) an arc to the next point about the centre after c; other vN are vias at no path point)
+5V: C2.1 C3.2 C5.1 C8.2 C9.2 C10.1 C15.2 C16.2 C17.2 C18.2 C19.1 D1.1 D3.1 IC1.3 IC2.8 IC3.5 IC3.31 IC4.16 K6.1 K7.1 K11.2 L1.2 R2.2 R16.2 R21.2 R22.2 R23.2 R24.2 R25.2 RE1.1 | length 362.6
  Top Layer w0.635: IC1.3 17.145,46.685 14.884,48.946 14.884,68.123 15.875,69.113 19.177,69.113 21,67.29 RE1.1 22.86,66.14 D1.1 ; C5.1 48.429,74.761 60.96,74.761 62.23,76.031 62.23,82.965 ; K6.1 55.77,6.985 L1.2 45.187,6.79 45.18,6.797 C10.1 48.585,24.36 C19.1 53.975,34.925 57.15,38.1 R2.2 57.15,44.323 59.271,44.323 61.176,46.228 62.992,46.228 C2.1 ; C18.2 D3.1 65.475,72.765 C3.2 65.405,62.96 IC2.8 ; C15.2 R23.2 62.23,83.134 67.31,83.134 ; C16.2 67.305,89.306 67.31,89.301 R24.2 67.31,83.134 ; C17.2 72.385,88.397 72.39,88.392 R25.2 ; IC4.16 92.202,81.28 ; R22.2 92.207,74.046 92.075,73.914 R21.2 86.36,73.914 84.912,75.362 84.912,80.747 86.161,81.995 91.487,81.995 92.202,81.28 ; IC3.5 96.52,29.261 96.825,29.566 C9.2 96.825,32.207 96.835,32.217 C8.2@96.835,33.426 ; C8.2 C8.2@96.835,33.426 ; K7.1 R16.2 103.505,32.36 103.251,32.106 98.831,32.106 97.511,33.426 C8.2@96.835,33.426 ; 67.31,83.134 72.39,83.134 R25.2 ; R25.2 89.941,84.455 92.202,82.194 92.202,81.28
  Bottom Layer w0.635: RE1.1 40.62,67.29 C5.1 ; C2.1 71.12,52.07 71.12,57.245 IC2.8 ; K11.2 72.949,3.099 65.481,3.099 K6.1 65.456,10.846 82.061,10.846 IC3.31 96.52,25.305 IC3.5
GND: B1.4 B2.4 C1.2 C2.2 C3.1 C4.2 C5.2 C6.1 C7.1 C8.1 C9.1 C10.2 C11.1 C12.1 C13.1 C18.1 C19.2 D2.2 ENC1.3 ENC1.4 IC1.2 IC1.4 IC2.4 IC3.6 IC3.18 IC3.32 IC4.1 K3.1 K6.4 K7.3 K10.3 K11.6 L2.2 pad.Mount1 pad.Mount2 pad.Mount3 pad.Mount4 R6.1 R8.1 R9.1 R10.1 R15.1 R20.1 T1.3 T4.3 T5.3 | length 568.8
  Top Layer w0.635: pad.Mount2 3.175,22.301 4.267,23.393 ; K3.1 4.267,42.901 4.267,23.393 ; T1.3 19.685,53.006 IC1.2 IC1.4 ; R10.1 30.485,38.872 30.8,38.557 R6.1 25.877,36.195 24.562,34.88 IC1.4 ; C1.2@41.741,55.88 C1.2 41.91,55.711 46.212,51.41 51.435,51.41 52.07,52.045 C12.1 C13.1 54.93,52.07 56.2,50.8 ; C10.2 43.18,33.02 C19.2 52.07,41.91 R9.1 ; R15.1 57.15,49.85 56.2,50.8 ; IC2.4 58.325,50.8 56.2,50.8 ; C3.1 67.305,64.795 69.215,62.885 69.215,59.665 68.58,59.03 66.889,58.936 66.889,57.15 67.575,56.464 74.93,56.464 75.88,57.414 75.88,61.107 ; K6.4 69.215,8.738 69.748,9.271 69.748,21.787 IC3.18 63.5,30.683 63.82,31.003 C11.1 63.82,34.341 60.96,34.341 59.69,35.611 D2.2 59.69,42.64 C2.2 63.278,43.942 73.736,43.942 74.727,44.933 74.727,50.211 73.655,51.283 C7.1 72.847,52.705 72.847,54 72.822,54.026 66.878,54.026 66.878,56.413 76.2,56.413 76.84,57.053 R8.1 76.84,60.147 75.88,61.107 ; C6.1 75.88,61.107 ; K10.3 92.71,8.89 92.71,26.765 IC3.6 94.925,28.98 C9.1 94.925,32.207 94.935,32.217 C8.1 94.935,36.83 95.57,37.465 K7.3 101.6,40.64 101.6,53.22 ENC1.3 98.095,56.725 98.095,75.866 99.093,76.863 99.093,81.685 97.282,83.495 IC4.1 ; 4.267,23.393 8.611,19.05 R20.1 9.525,20.32 12.7,23.495 L2.2 19.685,26.035 IC1.4
  Top Layer w1.27: B2.4 40.64,56.981 C1.2@41.741,55.88 ; C1.2 41.91,38.1 C19.2 ; C5.2 48.386,76.93 48.618,77.162 48.661,77.162 49.53,78.031 ; C4.2 49.53,78.031 ; C18.1 60.161,79.206 50.705,79.206 49.53,78.031
  Bottom Layer w0.635: 3.175,66.675 13.335,56.515 T1.3 ; L2.2 19.05,25.4 27.004,25.4 T4.3 31.623,24.13 35.433,20.32 35.433,16.51 T5.3 37.465,15.24 C10.2 ; IC2.4 60.23,46.99 C2.2 ; K6.4 71.577,9.347 79.553,9.347 K11.6 ; ENC1.4 87.575,55.245 ENC1.3 ; IC3.32 81.915,8.16 K11.6 ; K10.3 93.396,5.766 83.134,5.766 K11.6
  Bottom Layer w1.27: B1.4 B2.4 44.48,74.325 47.085,76.93 C5.2
NetB1_2: B1.2 B2.3 K1.1 RE1.3 | length 39.7
  Bottom Layer w1.27: K1.1 7.95,85.166 21.586,85.166 RE1.3 27.175,84.425 B1.2 37.435,79.375 B2.3
NetB1_3: B1.3 K2.1 RE1.7 | length 33.5
  Top Layer w1.27: K2.1 7.874,71.552 16.51,80.188 RE1.7
  Bottom Layer w1.27: RE1.7 19.685,79.375 B1.3
NetB2_1: B2.1 C4.1 IC1.1 | length 70.3
  Top Layer w0.635: B2.1@39.761,90.185 39.93,90.185 B2.1
  Top Layer w1.27: IC1.1 22.225,48.244 28.651,54.67 28.651,89.477 31.249,92.075 37.871,92.075 B2.1@39.761,90.185
  Bottom Layer w1.27: B2.1 42.019,88.096 49.361,88.096 C4.1
NetB2_2: B2.2 K1.2 RE1.6 | length 41.9
  Top Layer w0.635: 15.454,87.59 RE1.6
  Top Layer w1.27: K1.2 15.454,87.59
  Bottom Layer w1.27: RE1.6 19.09,90.17 27.94,90.17 31.496,86.614 38.451,86.614 B2.2
NetC6_2: C6.2 IC3.9 R5.1 | length 94.1
  Top Layer w0.635: R5.1 73.655,62.44 ; C6.2 73.98,62.765 73.655,62.44 ; IC3.9 86.563,46.888 86.563,70.587 75.26,81.89 68.58,81.89 66.802,80.112 66.802,71.679 73.655,64.826 73.655,62.44
NetC7_2: C7.2 IC2.5 R4.1 | length 9.6
  Top Layer w0.635: IC2.5 C7.2 71.755,51.1 73.655,49.2 R4.1
NetC11_2: C11.2 IC3.17 L1.1 | length 35.2
  Top Layer w0.635: L1.1 52.934,10.99 58.039,16.095 v1(58.039,26.111) ; C11.2 65.72,31.003 66.04,30.683 IC3.17
  Bottom Layer w0.635: v1(58.039,26.111) 64.116,26.111 IC3.17
NetC12_2: C12.2 IC3.10 R14.1 | length 112.9
  Top Layer w0.635: v1(48.514,53.061) 50.17,53.061 C12.2 R14.1
  Bottom Layer w0.635: v1(48.514,53.061) 48.514,45.822 62.586,31.75 106.578,31.75 107.848,30.48 107.848,26.848 98.425,26.848 97.684,27.589 97.684,29.199 95.352,29.199 95.144,28.99 95.144,26.873 95.118,26.848 83.82,26.848 IC3.10
NetC13_2: C13.2 IC2.3 R13.1 | length 18.4
  Top Layer w0.635: R13.1 50.17,49.378 51.059,50.267 v1(52.07,50.267) ; C13.2 56.83,54.407 59.392,54.407 IC2.3
  Bottom Layer w0.635: v1(52.07,50.267) 55.252,50.267 IC2.3
NetC14_1: C14.1 K11.3 | length 87.4
  Top Layer w0.635: C14.1 72.923,79.375 81.991,70.307 81.991,36.302 84.988,33.304 84.988,5.08 82.118,2.21 K11.3
NetC14_2: C14.2 D3.2 IC3.29 | length 75.9
  Top Layer w0.635: D3.2 C14.2 70.485,72.441 73.66,69.266 76.911,69.266 80.137,66.04 80.137,30.556 80.01,30.429 80.01,13.875 IC3.29
NetC15_1: C15.1 ENC1.1 IC3.38 R23.1 | length 147.1
  Top Layer w0.635: R23.1 C15.1 60.33,94.036 66.802,100.508 101.752,100.508 103.2,99.06 103.2,61.37 ENC1.1 104.724,52.596 104.724,32.309 102.87,30.455 102.87,13.875 IC3.38
NetC16_1: C16.1 ENC1.2 IC3.39 R24.1 | length 119.5
  Top Layer w0.635: R24.1 65.41,86.97 65.405,86.975 C16.1 65.405,90.602 66.04,91.237 75.311,91.237 80.162,86.385 92.463,86.385 98.204,80.645 98.204,77.241 97.206,76.244 97.206,55.114 ENC1.2
  Bottom Layer w0.635: ENC1.2 109.626,42.694 109.626,18.091 IC3.39
NetC17_1: C17.1 ENC1.5 IC3.37 R25.1 | length 106.4
  Top Layer w0.635: v1(68.91,84.353) 69.012,84.455 R25.1 70.49,86.97 70.485,86.975 C17.1
  Bottom Layer w0.635: v1(68.91,84.353) 71.704,84.353 80.543,75.514 80.543,57.277 ENC1.5 95.032,52.745 108.737,39.04 108.737,22.282 IC3.37
NetD1_2: D1.2 RE1.8 T1.1 | length 17.1
  Top Layer w0.635: RE1.8 16.51,63.326 16.176,62.992 T1.1 20.701,59.055 22.86,56.896 D1.2
NetD2_1: D2.1 IC3.11 R3.1 R6.2 | length 122.5
  Top Layer w0.635: v1(24.003,11.43) 24.003,24.323 32.7,33.02 R6.2 R3.1 ; D2.1 59.69,25.298 v1(60.884,24.105)
  Bottom Layer w0.635: v1(24.003,11.43) 61.493,11.43 62.128,12.065 62.128,13.97 63.398,15.24 68.485,15.24 77.35,24.105 ; v1(60.884,24.105) 77.35,24.105 ; IC3.11 77.35,24.105
NetIC2_1: IC2.1 R11.1 R14.2 | length 16.1
  Top Layer w0.635: R14.2 52.07,59.69 52.986,60.606 58.83,60.606 IC2.1 61.595,61.69 R11.1
NetIC2_2: IC2.2 R12.2 R15.2 | length 20.2
  Top Layer w0.635: R15.2 55.25,46.963 58.222,46.963 58.222,48.874 61.392,52.045 61.392,56.623 IC2.2 57.785,57.785 R12.2
NetIC2_6: IC2.6 R1.2 R8.2 | length 16.3
  Top Layer w0.635: IC2.6 77.47,55.245 78.74,56.515 ; R1.2 78.74,56.515 ; R8.2 78.74,56.515
NetIC2_7: IC2.7 R1.1 R5.2 | length 25.2
  Top Layer w0.635: IC2.7 R5.2 ; v1(75.26,52.603) 76.84,52.603 R1.1
  Bottom Layer w0.635: IC2.7 66.878,57.785 66.878,60.96 67.513,61.595 71.552,61.595 75.26,57.887 v1(75.26,52.603)
NetIC3_1: IC3.1 R19.1 | length 112.7
  Top Layer w0.635: v1(8.204,13.335) 8.204,10.16 R19.1
  Bottom Layer w0.635: v1(8.204,13.335) 39.98,13.335 46.939,20.295 46.939,23.546 52.603,29.21 93.377,29.21 94.255,30.088 104.627,30.088 IC3.1
NetIC3_2: IC3.2 K7.2 R16.1 | length 20.1
  Top Layer w0.635: K7.2 101.605,36.825 R16.1 ; IC3.2 107.188,31.083 v1(107.188,36.017)
  Bottom Layer w0.635: K7.2 102.413,36.017 v1(107.188,36.017)
NetIC3_7: IC3.7 K5.1 | length 9.4
  Top Layer w0.635: IC3.7 K5.1
NetIC3_8: IC3.8 K5.2 | length 9.9
  Top Layer w0.635: IC3.8 89.514,28.649 89.514,36.851 K5.2
NetIC3_12: IC3.12 K9.1 | length 10.1
  Top Layer w0.635: IC3.12 K9.1
NetIC3_13: IC3.13 K9.2 | length 10.1
  Top Layer w0.635: IC3.13 K9.2
NetIC3_14: IC3.14 K9.3 | length 10.1
  Top Layer w0.635: IC3.14 K9.3
NetIC3_15: IC3.15 K9.4 | length 10.1
  Top Layer w0.635: IC3.15 K9.4
NetIC3_16: IC3.16 K9.5 | length 10.1
  Top Layer w0.635: IC3.16 K9.5
NetIC3_19: IC3.19 R7.1 | length 35.5
  Top Layer w0.635: v1(33.985,41.173) 34.087,41.275 R7.1 ; v1(60.833,30.632) 60.96,30.505 IC3.19
  Bottom Layer w0.635: v1(33.985,41.173) 44.526,30.632 v1(60.833,30.632)
NetIC3_20: IC3.20 K4.1 | length 10.1
  Bottom Layer w0.635: K4.1 53.2,23.495 57.74,28.035 IC3.20
NetIC3_21: IC3.21 K4.3 | length 10.7
  Bottom Layer w0.635: K4.3 55.975,12.605 IC3.21
NetIC3_22: IC3.22 K4.2 | length 14.3
  Bottom Layer w0.635: K4.2 52.61,20.955 IC3.22
NetIC3_23: IC3.23 K6.2 | length 5.9
  Top Layer w0.635: IC3.23 63.5,7.62 K6.2
NetIC3_24: IC3.24 K6.3 | length 5.9
  Top Layer w0.635: IC3.24 66.04,7.62 K6.3
NetIC3_27: IC3.27 K11.1 | length 9.5
  Top Layer w0.635: IC3.27 73.66,7.62 K11.1
NetIC3_28: IC3.28 K11.4 | length 6.9
  Top Layer w0.635: IC3.28 79.375,9.43 K11.4
NetIC3_30: IC3.30 K11.5 | length 9.7
  Top Layer w0.635: IC3.30 83.464,10.421 83.464,5.994 K11.5
NetIC3_33: IC3.33 K10.1 | length 5.9
  Top Layer w0.635: IC3.33 89.535,11.97 K10.1
NetIC3_34: IC3.34 K10.2 | length 5.9
  Top Layer w0.635: IC3.34 91.44,7.62 K10.2
NetIC3_35: IC3.35 IC4.17 R21.1 | length 96
  Top Layer w0.635: R21.1 v1(91.084,75.814) 93.294,75.814 93.294,77.013 93.472,77.191 IC4.17
  Bottom Layer w0.635: v1(91.084,75.814) 110.515,56.383 110.515,12.954 108.788,11.227 95.358,11.227 IC3.35
NetIC3_36: IC3.36 IC4.18 R22.1 | length 93.6
  Top Layer w0.635: IC4.18 94.742,78.239 94.902,78.08 94.902,76.233 R22.1 96.037,75.946 96.037,48.285 87.452,39.7 87.452,36.758 87.528,36.682 87.528,6.35 88.214,5.664 95.25,5.664 96.52,6.934 IC3.36
NetIC4_2: IC4.2 LD1.11 | length 41.3
  Top Layer w0.635: LD1.11 78.765,99.085 101.016,99.085 102.311,97.79 102.311,94.615 101.676,93.98 99.619,93.98 96.012,90.373 IC4.2
NetIC4_3: IC4.3 LD1.4 | length 7.6
  Top Layer w0.635: LD1.4 94.742,94.488 IC4.3
NetIC4_4: IC4.4 LD1.2 | length 9.1
  Top Layer w0.635: IC4.4 v1(93.472,90.932)
  Bottom Layer w0.635: v1(93.472,90.932) LD1.2
NetIC4_5: IC4.5 LD1.5 | length 7.6
  Top Layer w0.635: LD1.5 92.202,94.488 IC4.5
NetIC4_6: IC4.6 LD1.7 | length 9.5
  Top Layer w0.635: IC4.6 v1(90.932,90.678)
  Bottom Layer w0.635: LD1.7 88.344,93.266 88.344,92.71 90.376,90.678 v1(90.932,90.678)
NetIC4_7: IC4.7 LD1.8 | length 15.6
  Top Layer w0.635: LD1.8 83.185,88.9 84.734,87.351 89.662,87.351 IC4.7
NetIC4_8: IC4.8 LD1.9 | length 24
  Top Layer w0.635: IC4.8 88.392,91.999 v1(89.535,93.142)
  Bottom Layer w0.635: LD1.9 87.274,89.256 91.44,89.256 92.075,89.891 92.075,91.44 90.373,93.142 v1(89.535,93.142)
NetIC4_9: IC4.9 LD1.6 | length 7.5
  Top Layer w0.635: IC4.9 87.122,94.742 LD1.6
NetIC4_12: IC4.12 LD1.12 | length 27.2
  Top Layer w0.635: v1(87.122,76.911) IC4.12
  Bottom Layer w0.635: LD1.12 73.025,91.008 v1(87.122,76.911)
NetIC4_13: IC4.13 LD1.10 | length 25.3
  Top Layer w0.635: IC4.13 88.392,77.699 v1(88.849,77.241)
  Bottom Layer w0.635: LD1.10 78.105,87.986 v1(88.849,77.241)
NetIC4_14: IC4.14 LD1.3 | length 37.3
  Top Layer w0.635: IC4.14 89.662,78.08 90.729,77.013 v1(92.151,77.013)
  Bottom Layer w0.635: v1(92.151,77.013) 102.311,87.173 102.311,98.044 101.6,98.755 98.755,98.755 LD1.3
NetIC4_15: IC4.15 LD1.1 | length 20.8
  Top Layer w0.635: IC4.15 v1(90.932,80.874)
  Bottom Layer w0.635: v1(90.932,80.874) 91.948,81.89 91.948,86.868 LD1.1
NetK2_2: K2.2 RE1.2 RE1.5 | length 37.8
  Top Layer w1.27: K2.2 7.932,66.472 RE1.2 23.851,82.709 23.851,83.464 16.51,90.805 RE1.5
NetK3_2: K3.2 R2.1 R4.2 R9.2 R13.2 | length 80.4
  Top Layer w0.635: v1(44.983,49.225) R9.2@50.599,43.609 ; R9.2 R9.2@50.599,43.609 ; R13.2 52.07,44.501 ; R4.2 60.3,47.625 58.749,46.074 56.996,46.074 55.25,44.328 R2.1 54.483,43.18 53.162,44.501 52.07,44.501 ; R9.2@50.599,43.609 50.978,43.988 50.978,44.501 52.07,44.501
  Bottom Layer w0.635: K3.2 15.672,49.225 v1(44.983,49.225)
NetK8_1: K8.1 L2.4 | length 22.6
  Bottom Layer w0.635: K8.1 8.636,29.896 8.636,26.924 L2.4
NetK8_2: K8.2 L2.3 | length 16.5
  Bottom Layer w0.635: K8.2 15.265,18.186 15.265,17.755 L2.3
NetL2_1: L2.1 T3.3 | length 17.7
  Top Layer w0.635: T3.3 15.24,19.05 L2.1
NetR7_2: R7.2 R10.2 T1.2 | length 36.2
  Top Layer w0.635: T1.2 20.879,54.686 20.879,43.612 21.59,42.901 31.75,42.901 32.385,42.266 R10.2 32.385,39.954 37.465,39.954 R7.2
NetR11_2: R11.2 R12.1 | length 22
  Top Layer w0.635: R12.1 55.25,59.309 55.657,59.717 58.318,59.717 58.878,59.157 62.23,59.157 62.865,59.792 62.865,67.589 62.23,68.224 60.609,68.224 59.695,67.31 R11.2
NetR17_1: R17.1 T2.2 T4.1 T5.2 | length 22.6
  Top Layer w0.635: T2.2 26.67,19.986 T4.1 ; R17.1 32.065,15.555 T5.2
  Bottom Layer w0.635: T2.2 T5.2
NetR18_1: R18.1 T2.3 T5.1 | length 36.9
  Top Layer w0.635: R18.1 26.985,13.706 25.425,15.265 25.425,24.13 26.924,25.629 28.651,25.629 29.515,24.765 29.515,19.021 T2.3
  Bottom Layer w0.635: T2.3 T5.1
NetR18_2: R18.2 T3.1 | length 5.3
  Top Layer w0.635: T3.1 21.59,6.35 R18.2
NetR19_2: R19.2 R20.2 T4.2 | length 28.7
  Top Layer w0.635: R19.2 R20.2 v1(13.564,17.15)
  Bottom Layer w0.635: v1(13.564,17.15) 16.363,14.351 21.184,14.351 26.67,19.837 T4.2
VIN: B1.1 C1.1 R3.2 R17.2 T2.1 T3.2 | length 108.4
  Top Layer w0.635: T3.2 18.567,6.833 18.567,4.978 20.32,3.226 28.311,3.226 30.165,5.08 R17.2 30.165,13.349 T2.1 28.623,15.589 28.792,15.589 37.46,24.257 37.46,36.42 37.643,36.602 38.036,36.602 38.557,37.123 38.557,48.396 34.392,52.562 C1.1@34.392,55.862 ; B1.1 33.095,88.765 B1.1@33.095,88.596
  Top Layer w1.27: B1.1@33.095,88.596 34.41,87.281 C1.1
pads on no net: ENC1.6 ENC1.7 IC3.3 IC3.4 IC3.25 IC3.26 IC3.40 IC4.10 IC4.11 IC4.19 IC4.20 RE1.4

## Polygon pours and split planes (outlines as drawn)
GND on Top Layer "GND_L01_P000" (solid, pour order 0): 3.175,98.425 107.95,98.425 107.95,3.175 3.175,3.175

## Silkscreen, mask and mechanical layers (free items; w line width, h text height)
Top Overlay:
  text "Soldeerstation V1.0" at 13.97,99.083 h2.03
  text "R. Theunissen 04/2022" at 13.97,97.178 h2.03
Board Outline:
  the board outline again, w0.254

## Text inside footprints (layer, text, board x,y; h text height)
B1: Top Overlay "+" at 34.099,89.348 h0.38 r90
B2: Top Overlay "+" at 42.354,89.348 h0.38 r90
C1: Top Overlay "-" at 41.395,53.721 h1.52
C2: Top Overlay "-" at 62.611,46.863 h1.52 r180
C4: Top Overlay "-" at 47.498,85.217 h1.52 r270
C5: Top Overlay "-" at 50.038,76.454 h1.52 r90
C10: Top Overlay "-" at 43.656,22.733 h1.52 r180
C19: Top Overlay "-" at 45.537,36.957 h1.52 r180